# Altium PCB Digital_To_Analog_Converter.PcbDoc
Units mil, origin at the board's own origin, x right, y up, seen from the top; angles counter-clockwise.
Board outline 800 x 1100 mil, 2 copper layers (Top Layer, Bottom Layer); 5 components, 7 nets, 32 pads, 0 vias.
Unrouted connection lines stored in the file: 3.
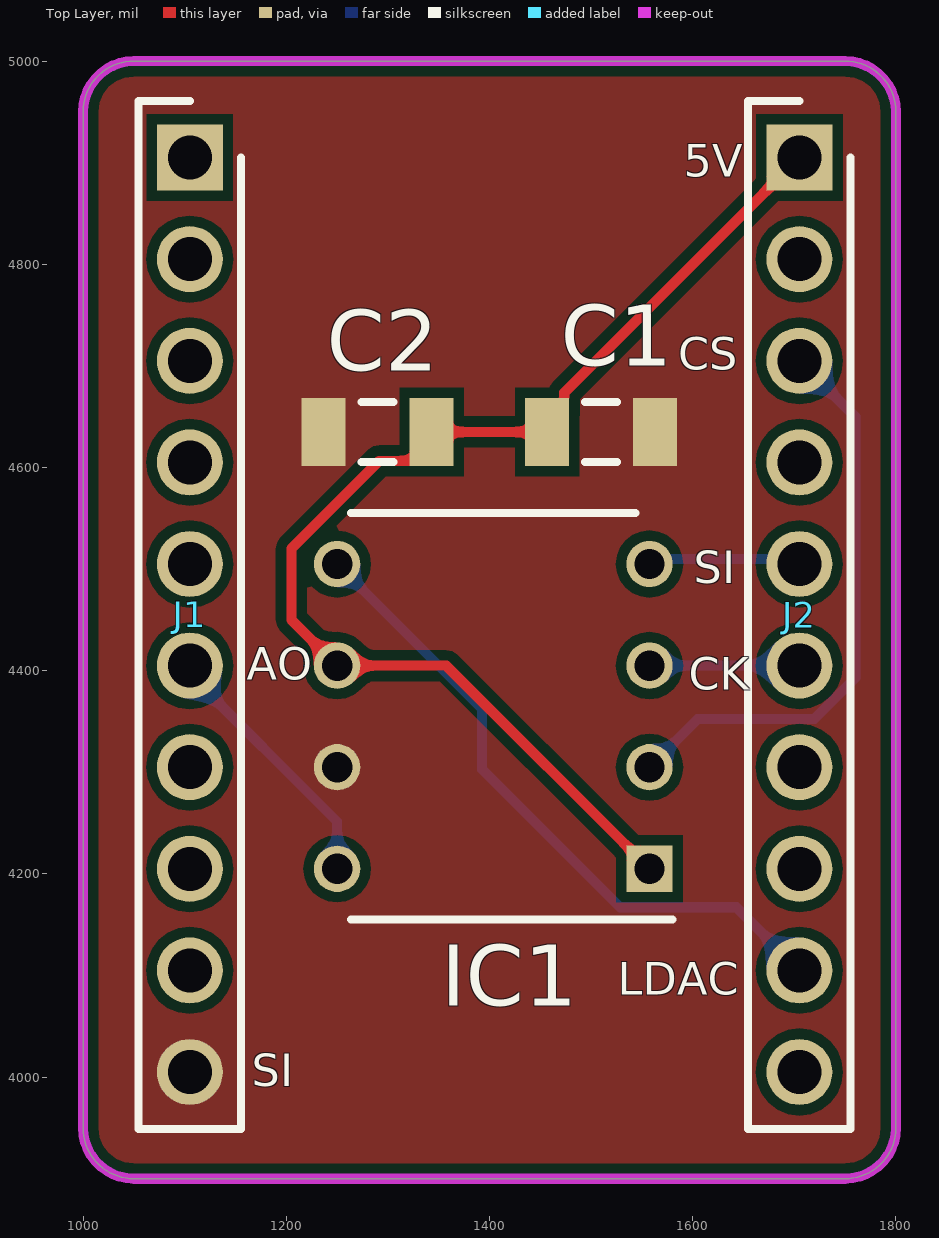
[diagram p0: Top Layer view]
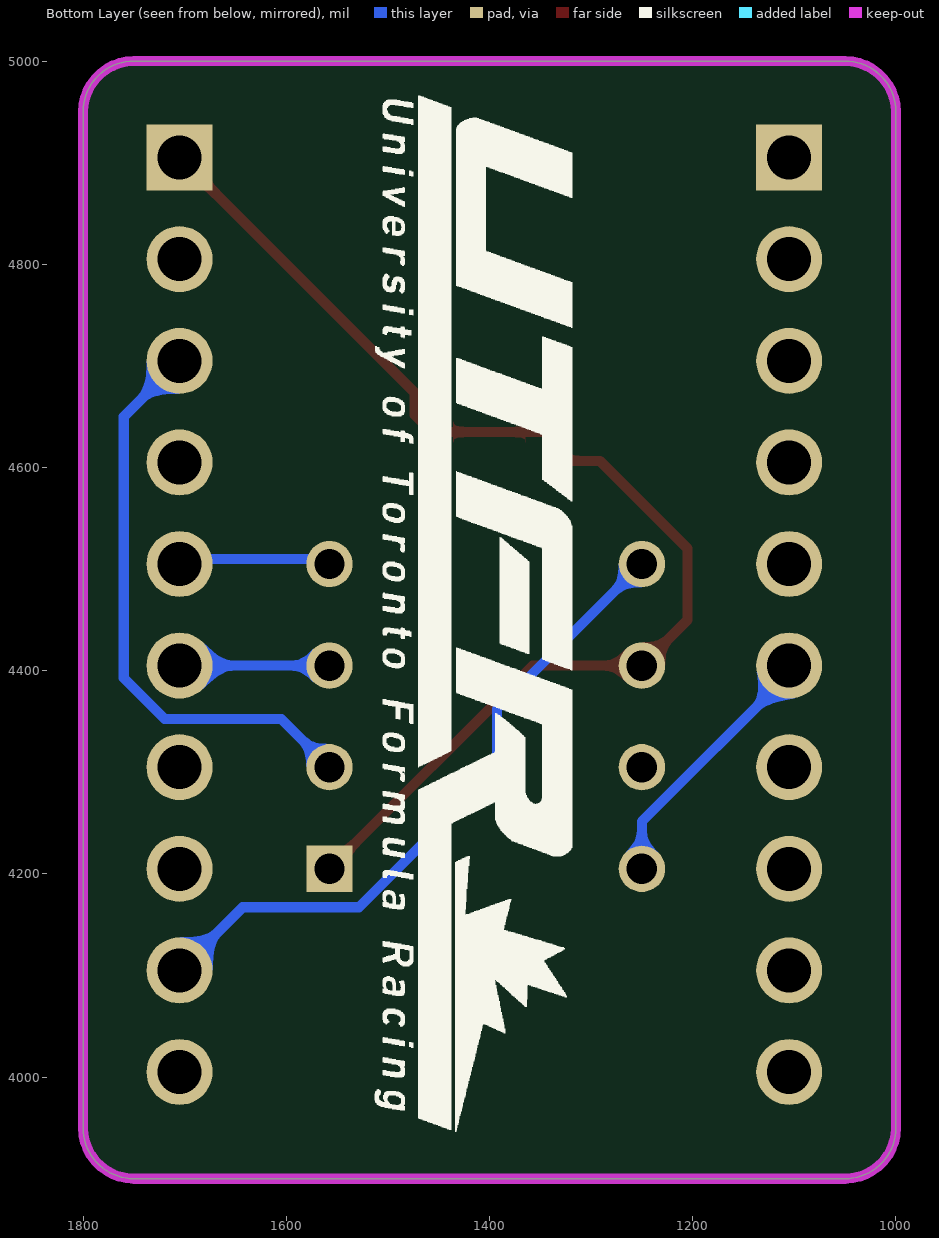
[diagram p1: Bottom Layer view, seen from below]
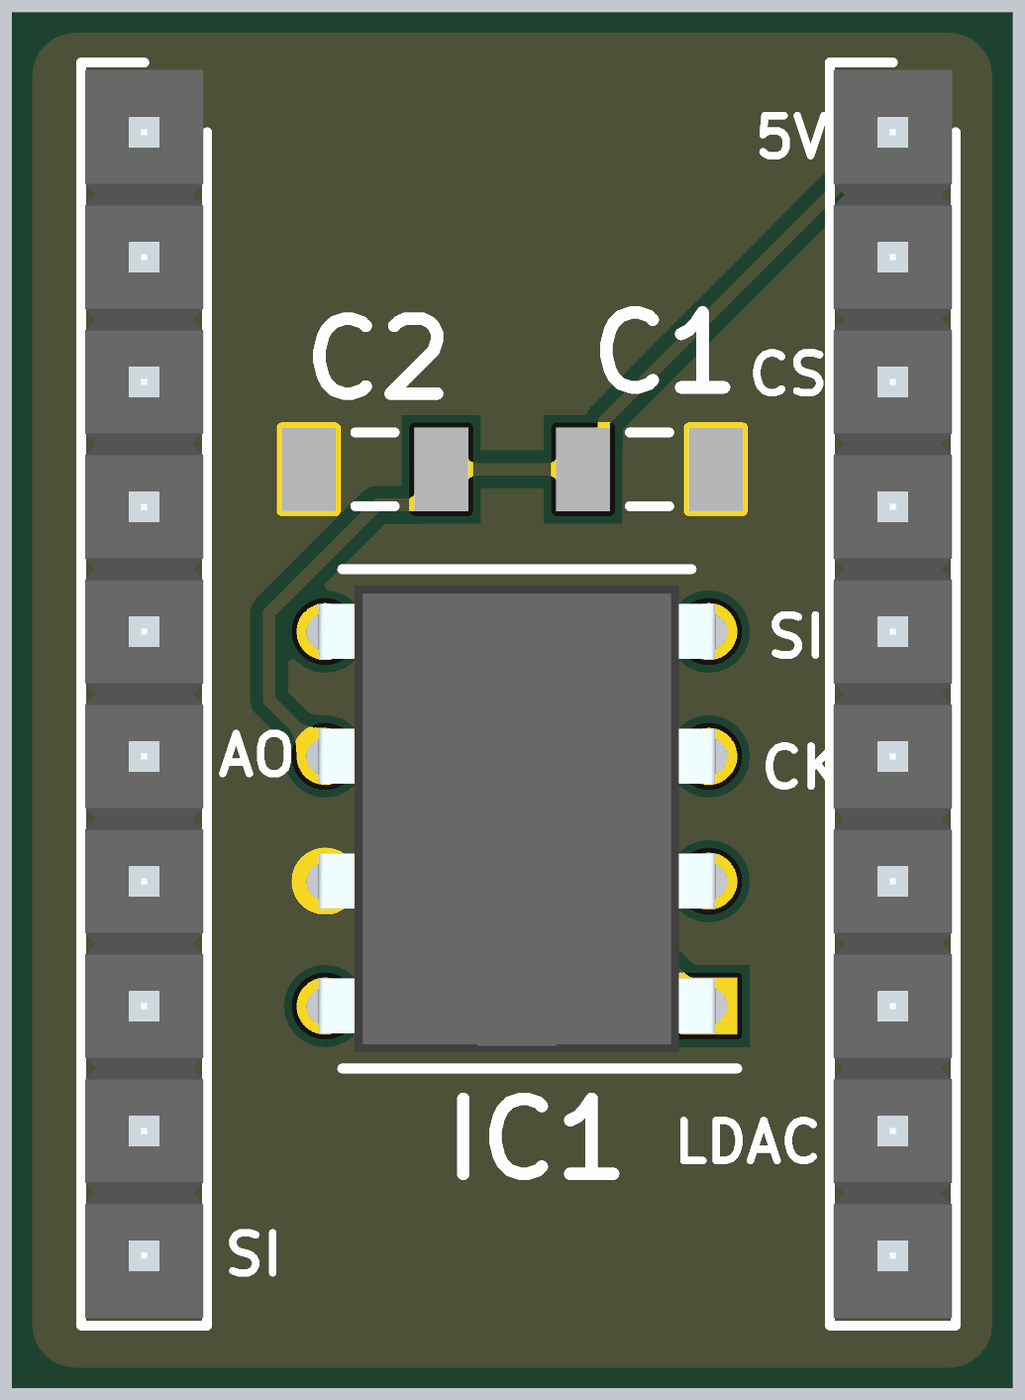
[diagram p2: 3D render of the assembled board from above, using the file's embedded part models]

## Layer stack, top to bottom
Top Solder: solder mask 0.4, Solder Resist, Dk 3.5
Top Layer: signal copper 1.4
Dielectric 1: dielectric 12.6, FR-4, Dk 4.8
Bottom Layer: signal copper 1.4
Bottom Solder: solder mask 0.4, Solder Resist, Dk 3.5

## Board outline
1000,3950 1000,4950 cw(c1050,4950) 1050,5000 1750,5000 cw(c1750,4950) 1800,4950 1800,3950 cw(c1750,3950) 1750,3900 1050,3900 cw(c1050,3950)

## Design rules (kind name [scope] priority, off if disabled: settings)
Clearance [All] p1: gap=10 ignorepadtopadclearanceinfootprint=FALSE except(0: Arc-Hole Track-Hole SMDPad-Hole THPad-Hole Via-Hole Fill-Hole Poly-Hole Region-Hole Text-Hole)
PolygonConnect PolygonConnect_2 [All vs IsNamedPolygon('INV_AGND_L01_P001')] p1: connectstyle=Direct reliefconductorwidth=10 reliefentries=4 polygonreliefangle="90 Angle" airgapwidth=10
PolygonConnect PolygonConnect_1 [All vs IsNamedPolygon('NONET_L01_P000')] p2: connectstyle=Direct reliefconductorwidth=10 reliefentries=4 polygonreliefangle="90 Angle" airgapwidth=10
PolygonConnect [All] p3: connectstyle=Relief reliefconductorwidth=10 reliefentries=4 polygonreliefangle="90 Angle" airgapwidth=10
RoutingVias [All] p1: holewidth=28 width=50 viastyle="Through Hole" minholewidth=28 minwidth=50 maxholewidth=28 maxwidth=50
SolderMaskExpansion [All] p1: expansion=4 istentingtop=FALSE
Width [All] p1: maxlimit=10 minlimit=10 preferedwidth=10
30 further rules are at their usual default settings.

## Components (designator, comment, footprint, x,y, rotation, side; value= is the part's Value field where it differs from the comment)
C1 "10uF" C1206 1510,4635 r0 top value=100nF
C2 "0.1uF" C1206 1290,4635 r180 top value=100nF
IC1 "MCP4911-E/P" DIP781W56P254L950H533Q8N 1403.74,4355 r180 top
J1 "68000-210HLF" HDRV10W63P0X254_1X10_2540X241X858P 1105,4905 r270 top
J2 "68000-210HLF" HDRV10W63P0X254_1X10_2540X241X858P 1705,4905 r270 top

## Footprints (in the part's own frame and the unit in brackets; to place one, negate y for a bottom-side part, rotate by r counter-clockwise, add the part's x,y. Pads: shape width x height; smd on the part's side, far side on the other; paste and mask are expansions set on the pad)
C1206 [mm] "Chip Capacitor, Body 3.2x1.6mm, IPC High Density"
  rect 1.1x1.7 smd: 1(-1.35,0) 2(1.35,0)
  silkscreen extent -0.4,-0.75 0.4,0.75, body extent -1.7,-0.9 1.7,0.9, height 1.3
DIP781W56P254L950H533Q8N [mm]
  rect 1.159x1.159 hole 0.759: 1(-3.905,3.81)
  round 1.159 hole 0.759: 2(-3.905,1.27) 3(-3.905,-1.27) 4(-3.905,-3.81) 5(3.905,-3.81) 6(3.905,-1.27) 7(3.905,1.27) 8(3.905,3.81)
  silkscreen extent -4.48,-5.08 3.56,5.08, body extent -4.05,-4.75 4.05,4.75, height 5.33
HDRV10W63P0X254_1X10_2540X241X858P [mm]
  rect 1.65x1.65 hole 1.1: 1(0,0)
  round 1.65 hole 1.1: 2(2.54,0) 3(5.08,0) 4(7.62,0) 5(10.16,0) 6(12.7,0) 7(15.24,0) 8(17.78,0) 9(20.32,0) 10(22.86,0)
  silkscreen extent -1.42,-1.28 24.28,1.28, body extent -1.27,-1.2 24.13,1.2, height 8.58

## Part data
C1 C2: library part "Cap Semi", "Capacitor (Semiconductor SIM Model)", LatestRevisionDate=29-May-2009, LatestRevisionNote="IPC-7351 Footprint Added.", PackageDescription="Chip Capacitor", PackageReference=C1206, Published=8-Jun-2000, Publisher="Altium Limited"
IC1: library part MCP4911-E_P, "Integrated Circuit", Manufacturer_Name=Microchip, Mouser Part Number=579-MCP4911-E/P, Arrow Part Number=MCP4911-E/P, Arrow Price/Stock=https://www.arrow.com/en/products/mcp4911-ep/microchip-technology?region=nac, Datasheet Link=http://uk.rs-online.com/web/p/products/7263882, Height=5.334mm, Manufacturer_Part_Number=MCP4911-E/P, Mouser Price/Stock=https://www.mouser.co.uk/ProductDetail/Microchip-Technology/MCP4911-E-P?qs=bxUt0k7cytJWZspBfmPK%2Fg%3D%3D
J1 J2: "Connector", Manufacturer_Name=Amphenol, Mouser Part Number=649-68000-210HLF, Arrow Part Number=68000-210HLF, Arrow Price/Stock=https://www.arrow.com/en/products/68000-210hlf/amphenol-fci, Datasheet Link=https://cdn.amphenol-icc.com/media/wysiwyg/files/drawing/68000.pdf, Height=8.58mm, Manufacturer_Part_Number=68000-210HLF, Mouser Price/Stock=https://www.mouser.co.uk/ProductDetail/Amphenol-FCI/68000-210HLF?qs=QKvFUfBIyQINb7f%2F4SDc2A%3D%3D

## Nets (pads, with @x,y where several pads share a name; then routed paths per layer and width w, separated by ;. In a path a pad name is that pad's centre, name@x,y a point inside that pad or via, vN(x,y) a via of type N, cw(c..) or ccw(c..) an arc to the next point about the centre after c; other vN are vias at no path point)
APPS_Out_Analog: IC1.8 J1.6 | length 274.9
  Top Layer w10: J1.6 J1.6@1115.52,4394.48
  Bottom Layer w10: J1.6 1105,4396.52 1250,4251.52 IC1.8
Arduino_5V: C1.1 C2.1 IC1.1 IC1.6 J2.1 | length 1201.3
  Top Layer w10: C2.1 1343.15,4623.19 1326.5,4606.54 1291.54,4606.54 1205,4520 1205,4450 IC1.6 1357.48,4405 IC1.1 ; C2.1@1345,4635 C1.1 1473.5,4651.65 1473.5,4673.5 J2.1
CS_DAC: IC1.2 J2.3 | length 573.8
  Bottom Layer w10: IC1.2 1604.96,4352.48 1719.63,4352.48 1760,4392.85 1760,4650 J2.3
INV_AGND: C1.2 C2.2 IC1.7 J1.10
LDAC: IC1.5 J2.9 | length 655.5
  Bottom Layer w10: IC1.5 1392.63,4362.37 1392.63,4303 1528.45,4167.19 1642.82,4167.19 J2.9
MOSI_Micro: IC1.4 J2.5 | length 163.2
  Top Layer w10: J2.5@1696.82,4513.18 J2.5
  Bottom Layer w10: IC1.4 1562.48,4510 1700,4510 J2.5
SCK_Micro: IC1.3 J2.6 | length 159.1
  Top Layer w10: J2.6@1696.82,4413.18 J2.6
  Bottom Layer w10: IC1.3 J2.6
pads on no net: J1.1 J1.2 J1.3 J1.4 J1.5 J1.7 J1.8 J1.9 J2.2 J2.4 J2.7 J2.8 J2.10

## Polygon pours and split planes (outlines as drawn)
INV_AGND on Top Layer "INV_AGND_L01_P001" (solid, remove dead copper, pour order 1): 1000,3900 1800,3900 1800,5000 1000,5000

## Keep-outs
Keep-Out Layer:
  the board outline again, w10

## Silkscreen, mask and mechanical layers (free items; w line width, h text height)
Top Overlay:
  text "5V" at 1591,4886 h32
  text "CS" at 1586,4696 h32
  text "SI" at 1601,4486 h32
  text "AO" at 1161,4391 h32
  text "CK" at 1596,4381 h32
  text "LDAC" at 1526,4081 h32
  text "SI" at 1166,3991 h32
Bottom Overlay:
  drawing of 42 lines, arcs and shapes, not listed